# EAGLE board CircuitArdBoard (EAGLE 9.6.2)
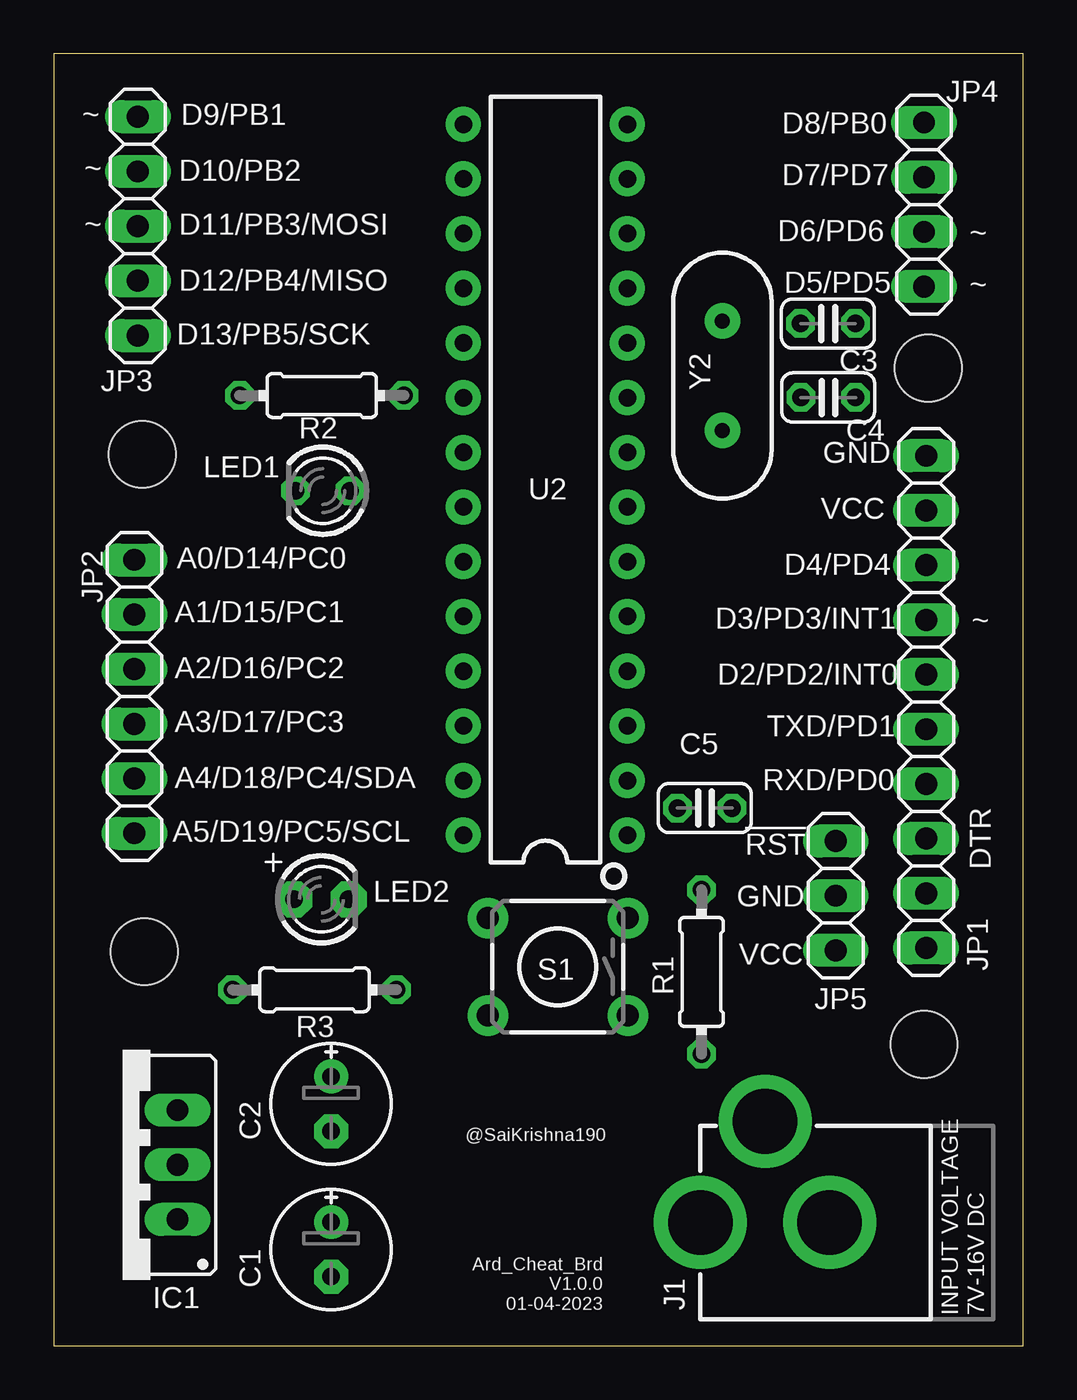
[diagram p0: board, top side]
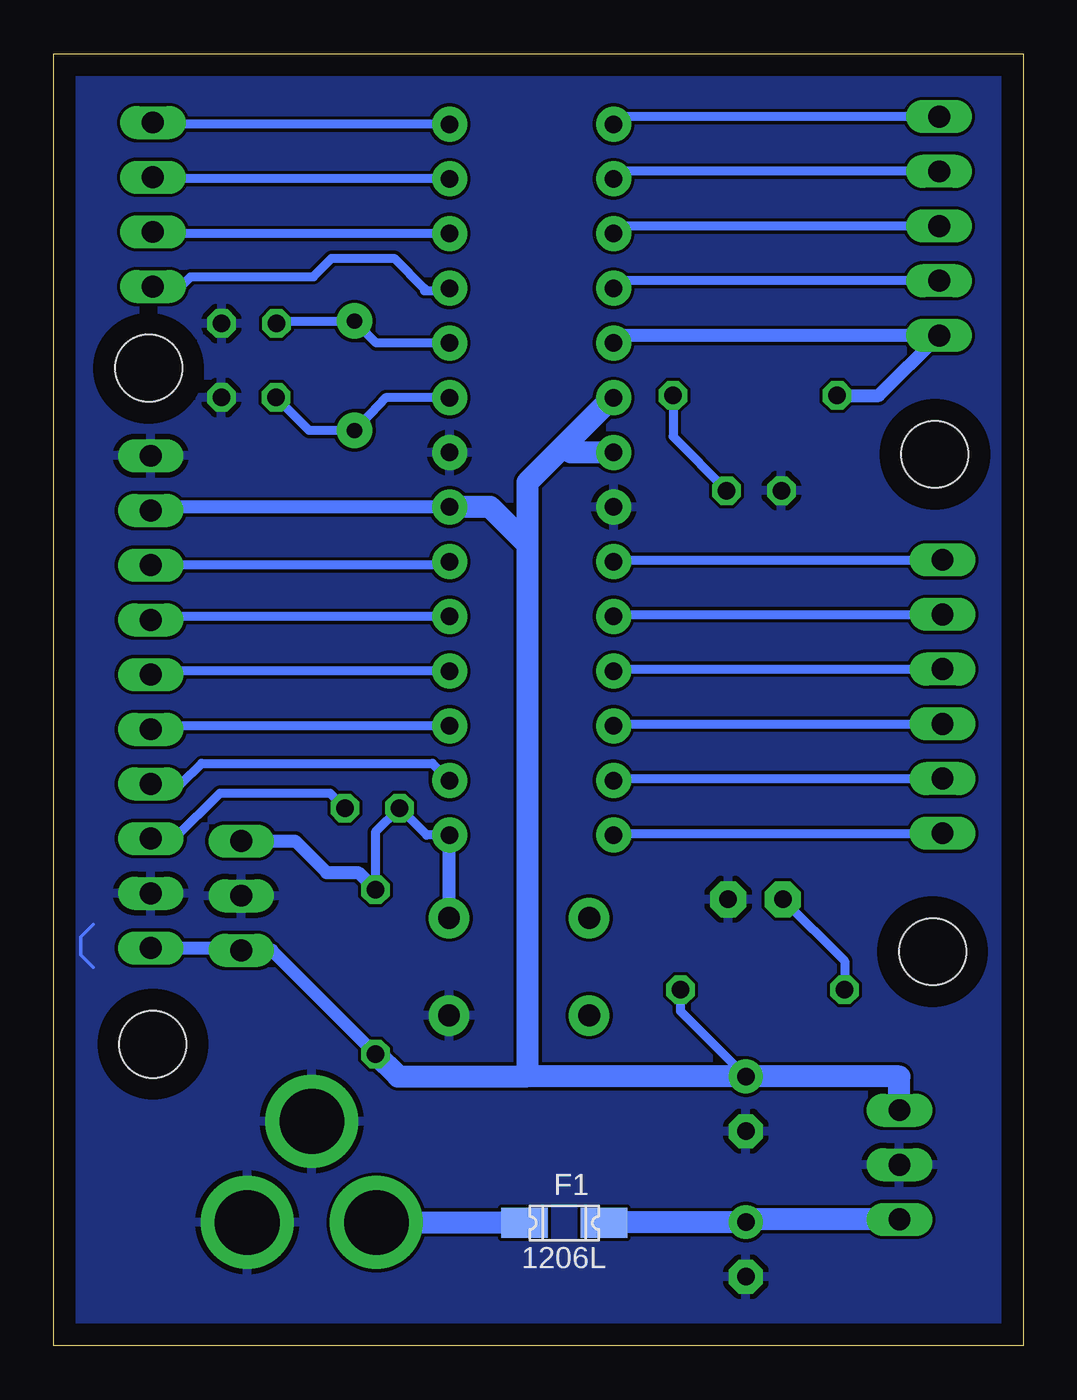
[diagram p1: board, bottom side, seen from below]

Size 45 x 60 mm. Coordinates in mm from the lower left corner, seen from the top.
Outline: 0,0 45,0 45,60 0,60 0,0
Copper layers (1*16): Top 0.035mm / dielectric 1.5mm / Bottom 0.035mm
Design rules "default": minimum track width 6mil, minimum drill 0.35mm, track to track 6mil, track to pad 6mil, pad to pad 6mil, via to via 6mil, smd to smd 6mil, copper to edge 40mil, drill to drill 6mil, minimum pad ring 10mil, minimum via ring 8mil, stop-mask expansion 4mil, vias tented up to drill 0mil, thermal gap 10mil
Holes 3.1 mm at 40.4,14 40.6,45.4 4.1,41.4 4.2,18.3

## Footprints (pad centres in the part's own frame; a part is rotated, then mirrored left to right if it is on the bottom)
E2,5-6E = drill 0.813 pad 1.575: + -1.27,0 | drill 0.813 pad 1.575 octagon: - 1.27,0
C025-024X044 = drill 0.813 octagon: 1 -1.27,0; 2 1.27,0
1206L = smd 2.16 x 1.4: P$1 -1.85,0; P$2 1.85,0
78XXS = drill 1.016 long: GND 0,-2.54; IN -2.54,-2.54; OUT 2.54,-2.54
POWER_JACK_PTH = drill 2.997 pad 4.318: GND 0,7.7; GNDBREAK 4.7,10.7; PWR 0,13.7
1X10 = drill 1.016 long: 1 -11.43,0; 2 -8.89,0; 3 -6.35,0; 4 -3.81,0; 5 -1.27,0; 6 1.27,0; 7 3.81,0; 8 6.35,0; 9 8.89,0; 10 11.43,0
1X06 = drill 1.016 long: 1 -6.35,0; 2 -3.81,0; 3 -1.27,0; 4 1.27,0; 5 3.81,0; 6 6.35,0
1X05 = drill 1.016 long: 1 -5.08,0; 2 -2.54,0; 3 0,0; 4 2.54,0; 5 5.08,0
1X04 = drill 1.016 long: 1 -3.81,0; 2 -1.27,0; 3 1.27,0; 4 3.81,0
1X03 = drill 1.016 long: 1 -2.54,0; 2 0,0; 3 2.54,0
LED3MM = drill 0.813 octagon: A -1.27,0; K 1.27,0
LED3MM' = drill 0.813 pad 1.676 octagon: A -1.27,0; K 1.27,0
0204/7 = drill 0.813 octagon: 1 -3.81,0; 2 3.81,0
TACTILE_SWITCH_PTH_6.0MM = drill 1.016 pad 1.88: 1 -3.251,2.261; 2 3.251,2.261; 3 -3.251,-2.261; 4 3.251,-2.261
DIP28 = drill 0.813 pad 1.626: 1 -16.51,-3.81; 2 -13.97,-3.81; 3 -11.43,-3.81; 4 -8.89,-3.81; 5 -6.35,-3.81; 6 -3.81,-3.81; 7 -1.27,-3.81; 8 1.27,-3.81; 9 3.81,-3.81; 10 6.35,-3.81; 11 8.89,-3.81; 12 11.43,-3.81; 13 13.97,-3.81; 14 16.51,-3.81; 15 16.51,3.81; 16 13.97,3.81; 17 11.43,3.81; 18 8.89,3.81; 19 6.35,3.81; 20 3.81,3.81; 21 1.27,3.81; 22 -1.27,3.81; 23 -3.81,3.81; 24 -6.35,3.81; 25 -8.89,3.81; 26 -11.43,3.81; 27 -13.97,3.81; 28 -16.51,3.81
HC49US = drill 0.7 pad 1.651: 1 -2.54,0; 2 2.54,0

## Placement (x,y rotation side)
C1  10uf  [E2,5-6E]  12.87,4.47 270 top
C2  10uf  [E2,5-6E]  12.87,11.23 270 top
C3  22pf  [C025-024X044]  35.94,47.47 0 top
C4  22pf  [C025-024X044]  35.95,44.04 0 top
C5  0.1uf  [C025-024X044]  30.22,24.97 0 top
F1  1206L  [1206L]  21.3,5.7 0 bottom
IC1  7805  [78XXS]  3.2,8.4 90 top
J1  POWER_JACK  [POWER_JACK_PTH]  43.72,5.72 90 top
JP1  [1X10]  40.5,29.9 90 top
JP2  [1X06]  3.74,30.15 270 top
JP3  [1X05]  3.9,52 270 top
JP4  [1X04]  40.4,53 90 top
JP5  [1X03]  36.3,20.9 90 top
LED1  GREEN  [LED3MM]  12.49,39.71 180 top
LED2  RED  [LED3MM']  12.42,20.73 0 top
R1  10k  [0204/7]  30.07,17.36 270 top
R2  220E  [0204/7]  12.44,44.13 180 top
R3  220E  [0204/7]  12.1,16.53 180 top
S1  SPST  [TACTILE_SWITCH_PTH_6.0MM]  23.4,17.6 180 top
U2  328P  [DIP28]  22.82,40.22 90 top
Y2  16MHz  [HC49US]  31.04,45.05 270 top

## Library data of the parts
C1-C5 = rcl; SPICEPREFIX: C
F1 = ptc-littlefuse
IC1 = v-reg
J1 = SparkFun-Connectors; PROD_ID: CONN-08197
JP1-JP5 = pinhead
LED1 = led
LED2 = adafruit
R1-R3 = rcl; SPICEPREFIX: R
S1 = SparkFun-Switches; PROD_ID: SWCH-08441; SF_SKU: COM-00097
U2 = SparkFun-IC-Microcontroller; PROD_ID: IC-09136
Y2 = SparkFun-Clocks; PROD_ID: XTAL-08181; SF_ID: COM-00536

## Nets
!RESET: C5.1 JP5.3 R1.1 S1.3 U2.1
A0: JP2.1 U2.23
A1: JP2.2 U2.24
A2: JP2.3 U2.25
A3: JP2.4 U2.26
A4: JP2.5 U2.27
A5: JP2.6 U2.28
D2: JP1.6 U2.4
D3: JP1.7 U2.5
D4: JP1.8 U2.6
D5: JP4.1 U2.11
D6: JP4.2 U2.12
D7: JP4.3 U2.13
D8: JP4.4 U2.14
D9: JP3.1 U2.15
D10: JP3.2 U2.16
D11: JP3.3 U2.17
D12: JP3.4 U2.18
D13: JP3.5 R2.2 U2.19
DTR: C5.2 JP1.3
GND: C1.- C2.- C3.2 C4.2 IC1.GND J1.GND J1.GNDBREAK JP1.2 JP1.10 JP5.2 LED1.K LED2.K S1.1 U2.8 U2.22
N$1: C1.+ F1.P$2 IC1.IN
N$3: C3.1 U2.10 Y2.1
N$4: C4.1 U2.9 Y2.2
N$5: LED1.A R2.1
N$6: LED2.A R3.2
N$7: F1.P$1 J1.PWR
RX: JP1.4 U2.2
TX: JP1.5 U2.3
VCC: C2.+ IC1.OUT JP1.1 JP1.9 JP5.1 R1.2 R3.1 U2.7 U2.20 U2.21

## Tracks (layer width: path | path; a pad name or v marks a point on that pad's centre or on a via)
!RESET
  Bottom 0.406: R1.1 30.07,23.85 C5.1 27.69,23.71 U2.1
  Bottom 0.61: S1.3 26.65,23.69 U2.1 | R1.1 30.87,21.97 32.33,21.97 33.8,23.44 JP5.3
A0
  Bottom 0.406: U2.23 18.92,36.5 JP2.1
A1
  Bottom 0.406: U2.24 18.92,33.96 JP2.2
A2
  Bottom 0.406: U2.25 18.92,31.42 JP2.3
A3
  Bottom 0.406: U2.26 18.92,28.88 JP2.4
A4
  Bottom 0.406: U2.27 18.92,26.34 JP2.5
A5
  Bottom 0.406: U2.28 18.92,23.8 JP2.6
D2
  Bottom 0.406: U2.4 40.34,31.33 JP1.6
D3
  Bottom 0.406: U2.5 40.34,33.87 JP1.7
D4
  Bottom 0.406: U2.6 26.79,36.25 JP1.8
D5
  Bottom 0.406: U2.11 26.74,49 27.8,49 27.8,49.1 29.2,50.5 32.1,50.5 32.95,49.65 38.65,49.65 39.11,49.19 JP4.1
D6
  Bottom 0.406: U2.12 40.32,51.65 JP4.2
D7
  Bottom 0.406: U2.13 40.32,54.19 JP4.3
D8
  Bottom 0.406: U2.14 40.32,56.73 JP4.4
D9
  Bottom 0.406: JP3.1 18.66,57.08 U2.15
D10
  Bottom 0.406: JP3.2 18.66,54.54 U2.16
D11
  Bottom 0.406: JP3.3 18.66,52 U2.17
D12
  Bottom 0.406: JP3.4 18.66,49.46 U2.18
D13
  Bottom 0.61: R2.2 6.69,44.13 JP3.5 18.66,46.92 U2.19
DTR
  Bottom 0.406: C5.2 32.19,25.67 37.28,25.67 39.4,23.55 JP1.3
GND
  Bottom 0.152: 43.17,17.58 43.75,18.16 43.75,18.98 43.17,19.56
  pour Bottom: 0,0 0,59.9 0.1,60 44.9,60 45.1,59.8 45.1,0.2 44.8,-0.1 0.1,-0.1
N$1
  Bottom 1.016: IC1.IN 12.75,5.86 C1.+ 19.41,5.74 F1.P$2
N$3
  Bottom 0.406: U2.10 30.02,46.57 Y2.1 34.55,47.59 C3.1
N$4
  Bottom 0.406: U2.9 29.6,44.03 Y2.2 33.15,42.51 C4.1
N$5
  Bottom 0.406: R2.1 16.25,42.23 LED1.A
N$6
  Bottom 0.406: LED2.A 8.29,17.87 R3.2
N$7
  Bottom 1.016: J1.PWR 23.17,5.72 F1.P$1
RX
  Bottom 0.406: U2.2 27.43,27.05 38.14,27.05 39.1,26.09 JP1.4
TX
  Bottom 0.406: U2.3 40.34,28.79 JP1.5
VCC
  Bottom 0.406: R3.1 15.91,15.54 C2.+
  Bottom 0.61: U2.7 40.34,38.95 JP1.9 | R1.2 34.88,18.36 JP5.1 36.41,18.47 JP1.1
  Bottom 1.016: IC1.OUT 5.74,12.5 C2.+ 23.1,12.5 | 23.1,12.5 29.02,12.5 R1.2 | 23.1,12.5 23,12.6 23,37.2 | 23,37.2 24.75,38.95 U2.7 | 23,37.2 23,40.1 21.3,41.8 | U2.20 19.07,44.03 21.3,41.8 | 21.3,41.8 20.99,41.49 U2.21

## Text on the board
tNames: D9/PB1 | D8/PB0 | D10/PB2 | D7/PD7 | D11/PB3/MOSI | D6/PD6 | D12/PB4/MISO | D5/PD5 | D13/PB5/SCK | VCC | A0/D14/PC0 | D4/PD4 | A1/D15/PC1 | D3/PD3/INT1 | A2/D16/PC2 | D2/PD2/INT0 | A3/D17/PC3 | TXD/PD1 | A4/D18/PC4/SDA | RXD/PD0 | DTR | !RST | A5/D19/PC5/SCL | GND | VCC
bNames: F1 | 1206L
_tsilk: ~ | ~ | ~ | ~ | ~ | GND | ~ | @SaiKrishna190 | Ard_Cheat_Brd / V1.0.0 / 01-04-2023 | INPUT VOLTAGE / 7V-16V DC